# Altium PCB Copy of ANT-F-2.4G-FR4.PcbDoc (part 1 of 3)
Units mil, origin at the board's own origin, x right, y up, seen from the top; angles counter-clockwise.
Board outline 8878.9 x 2863.35 mil, 2 copper layers (Top Layer, Bottom Layer); 99 components, 48 nets, 825 pads, 1430 vias.
Unrouted connection lines stored in the file: 96.
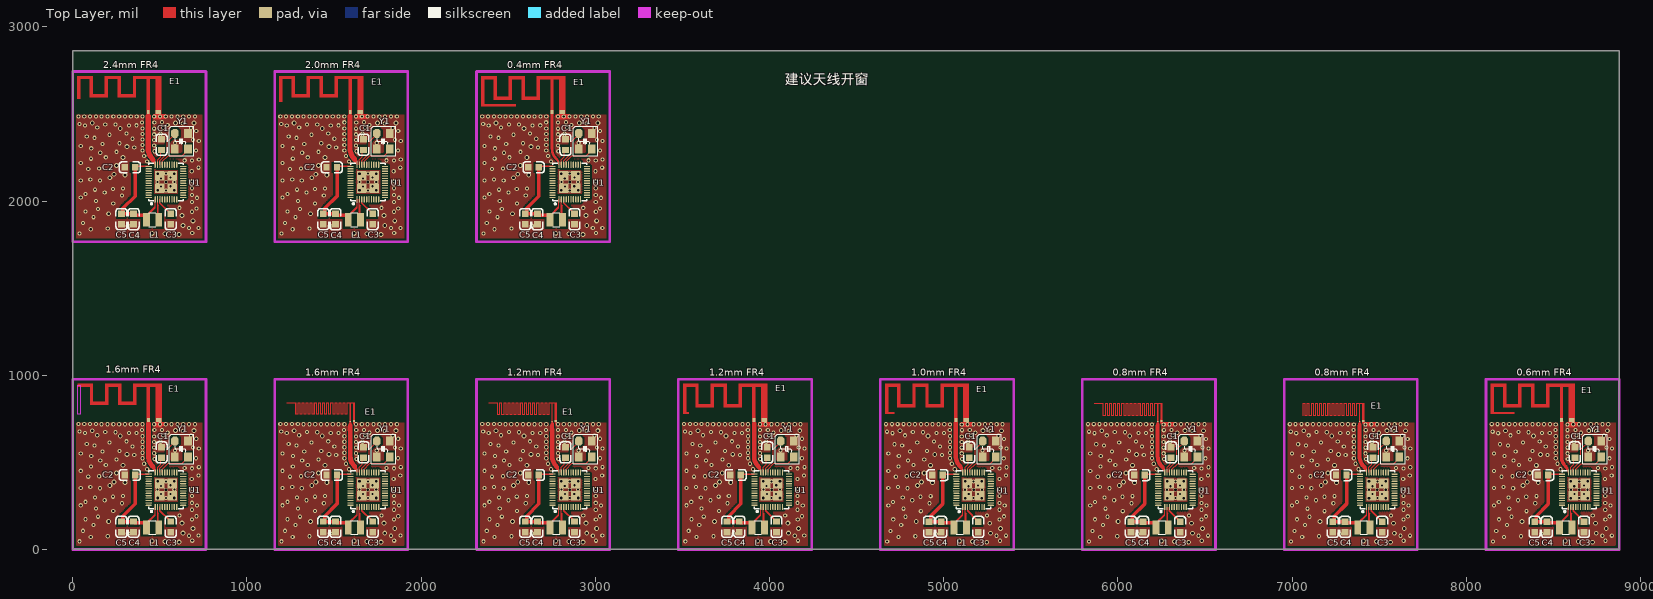
[diagram p0: Top Layer view]
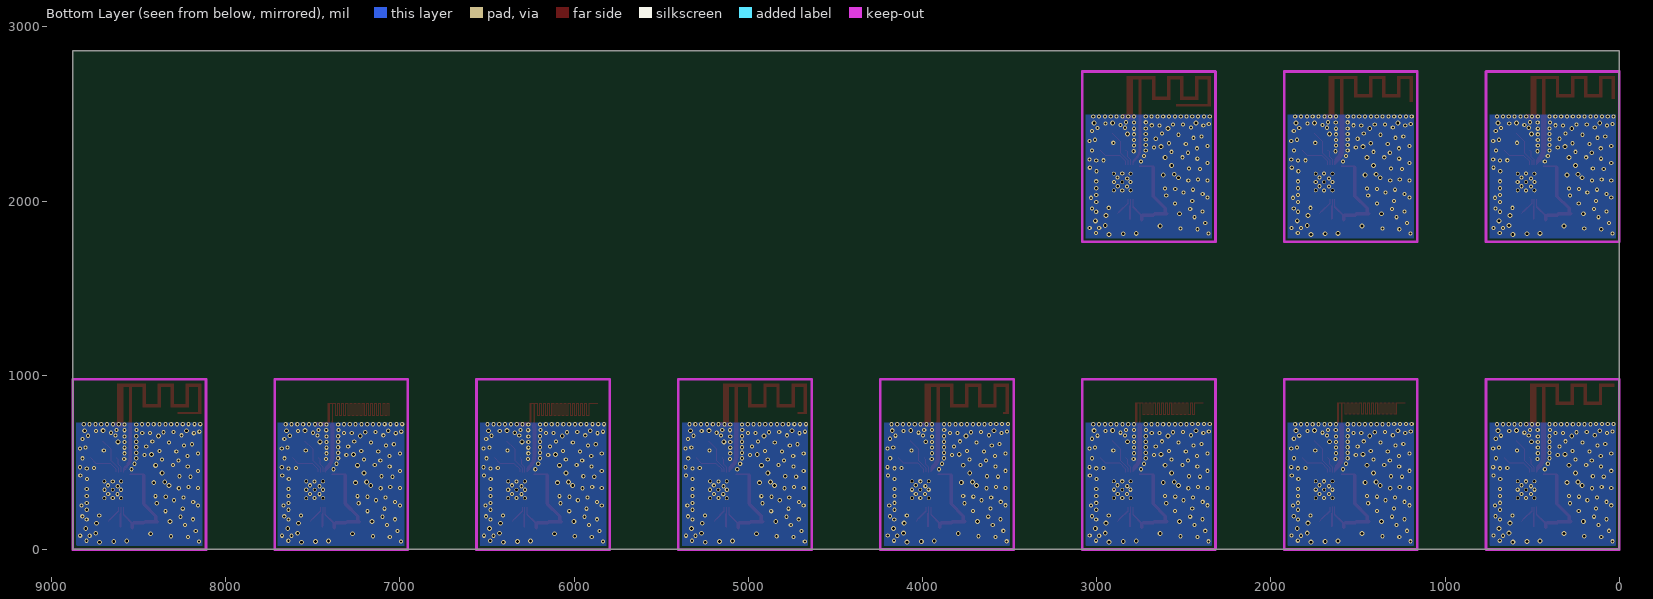
[diagram p1: Bottom Layer view, seen from below]

## Layer stack, top to bottom
Top Solder: solder mask 0.4, Solder Resist, Dk 3.5
Top Layer: signal copper 1.4
Dielectric 1: dielectric 12.6, FR-4, Dk 4.8
Bottom Layer: signal copper 1.4
Bottom Solder: solder mask 0.4, Solder Resist, Dk 3.5

## Board outline
0,0.33 0,2863.68 8878.9,2863.68 8878.9,0.33

## Design rules (kind name [scope] priority, off if disabled: settings)
AssemblyTestPointUsage [All] p0: scope1count=1 scope1_0_kind=Board scope1_0_value=Board scope2count=1 scope2_0_kind=Board scope2_0_value=Board commentlength=0
AssemblyTestpoint [All] p0: scope1count=1 scope1_0_kind=Board scope1_0_value=Board scope2count=1 scope2_0_kind=Board scope2_0_value=Board commentlength=0
Clearance Clearance_2 [All] p0: scope1count=1 scope1_0_kind=Net scope1_0_value=ANT scope2count=1 scope2_0_kind=Board scope2_0_value=Board commentlength=0 gap=6
Clearance [All] p0: scope1count=1 scope1_0_kind=Board scope1_0_value=Board scope2count=1 scope2_0_kind=Board scope2_0_value=Board commentlength=0 gap=6
Clearance Clearance_1 [All] p0 off: scope1count=1 scope1_0_kind=Board scope1_0_value=Board scope2count=1 scope2_0_kind=Board scope2_0_value=Board commentlength=48 gap=10 // Protel DXP Scope 1 Expression Was: InPolygon
Clearance Clearance_2 [InNet('ANT')] p1: gap=6 ignorepadtopadclearanceinfootprint=FALSE
Clearance Clearance_1 [InPolygon] p2: gap=10 ignorepadtopadclearanceinfootprint=FALSE
Clearance [All] p3: gap=6 ignorepadtopadclearanceinfootprint=FALSE except(8: Arc-Via Track-Via SMDPad-Via THPad-Via Via-Via Via-Fill Via-Poly Via-Region Via-Hole)
ComponentClearance [All] p0 off: scope1count=1 scope1_0_kind=Board scope1_0_value=Board scope2count=1 scope2_0_kind=Board scope2_0_value=Board commentlength=0 gap=10 collisioncheckmode=3
ComponentClearance [All] p1 off: gap=10 collisioncheckmode=3 verticalgap=10 showdistances=FALSE
DiffPairsRouting [All] p0: scope1count=1 scope1_0_kind=Board scope1_0_value=Board scope2count=1 scope2_0_kind=Board scope2_0_value=Board commentlength=0
DiffPairsRouting [All] p1: maxlimit=10 minlimit=7 mostfreqgap=8 toplayer_minwidth=6 toplayer_maxwidth=15 toplayer_prefwidth=8 bottomlayer_minwidth=6 bottomlayer_maxwidth=15 bottomlayer_prefwidth=8 maxuncoupledlength=500
FabricationTestPointUsage [All] p0: scope1count=1 scope1_0_kind=Board scope1_0_value=Board scope2count=1 scope2_0_kind=Board scope2_0_value=Board commentlength=0 valid=0 allowmultiple=FALSE
FabricationTestpoint [All] p0: scope1count=1 scope1_0_kind=Board scope1_0_value=Board scope2count=1 scope2_0_kind=Board scope2_0_value=Board commentlength=0 side=3 testpointundercomponent=TRUE minsize=40 maxsize=100 preferedsize=60 minholesize=0 maxholesize=40 preferedholesize=32 testpointgrid=1
FanoutControl Fanout_Default [All] p0: scope1count=1 scope1_0_kind=Board scope1_0_value=Board scope2count=1 scope2_0_kind=Board scope2_0_value=Board commentlength=30 // Fanout_Default (Default Rule)
FanoutControl Fanout_Small [All] p0 off: scope1count=1 scope1_0_kind=Board scope1_0_value=Board scope2count=1 scope2_0_kind=Board scope2_0_value=Board commentlength=84 // Protel DXP Scope 1 Expression Was: (CompPinCount < 5)   Fanout_Small (Default Rule)
FanoutControl Fanout_SOIC [All] p0 off: scope1count=1 scope1_0_kind=Board scope1_0_value=Board scope2count=1 scope2_0_kind=Board scope2_0_value=Board commentlength=71 // Protel DXP Scope 1 Expression Was: IsSOIC   Fanout_SOIC (Default Rule)
FanoutControl Fanout_LCC [All] p0 off: scope1count=1 scope1_0_kind=Board scope1_0_value=Board scope2count=1 scope2_0_kind=Board scope2_0_value=Board commentlength=69 // Protel DXP Scope 1 Expression Was: IsLCC   Fanout_LCC (Default Rule)
FanoutControl Fanout_BGA [All] p0 off: scope1count=1 scope1_0_kind=Board scope1_0_value=Board scope2count=1 scope2_0_kind=Board scope2_0_value=Board commentlength=69 // Protel DXP Scope 1 Expression Was: IsBGA   Fanout_BGA (Default Rule)
Height [All] p0: scope1count=1 scope1_0_kind=Board scope1_0_value=Board scope2count=1 scope2_0_kind=Board scope2_0_value=Board commentlength=0
HoleSize [All] p0: scope1count=1 scope1_0_kind=Board scope1_0_value=Board scope2count=1 scope2_0_kind=Board scope2_0_value=Board commentlength=0 absolutevalues=TRUE maxlimit=100 minlimit=1 maxpercent=80.000 minpercent=20.000
HoleToHoleClearance [All] p0: scope1count=1 scope1_0_kind=Board scope1_0_value=Board scope2count=1 scope2_0_kind=Board scope2_0_value=Board commentlength=0
LayerPairs [All] p0: scope1count=1 scope1_0_kind=Board scope1_0_value=Board scope2count=1 scope2_0_kind=Board scope2_0_value=Board commentlength=0 enforce=TRUE
MinimumSolderMaskSliver [All] p0 off: scope1count=1 scope1_0_kind=Board scope1_0_value=Board scope2count=1 scope2_0_kind=Board scope2_0_value=Board commentlength=0
MinimumSolderMaskSliver [All] p1 off: minsoldermaskwidth=10
NetAntennae [All] p0: scope1count=1 scope1_0_kind=Board scope1_0_value=Board scope2count=1 scope2_0_kind=Board scope2_0_value=Board commentlength=0
PasteMaskExpansion [All] p0: scope1count=1 scope1_0_kind=Board scope1_0_value=Board scope2count=1 scope2_0_kind=Board scope2_0_value=Board commentlength=0 expansion=0
PlaneClearance [All] p0: scope1count=1 scope1_0_kind=Board scope1_0_value=Board scope2count=1 scope2_0_kind=Board scope2_0_value=Board commentlength=0 clearance=20
PlaneConnect [All] p0: scope1count=1 scope1_0_kind=Board scope1_0_value=Board scope2count=1 scope2_0_kind=Board scope2_0_value=Board commentlength=0 planeconnectstyle=Relief reliefexpansion=20 reliefentries=4 reliefconductorwidth=10 reliefairgap=10
PolygonConnect [All] p0: scope1count=1 scope1_0_kind=Board scope1_0_value=Board scope2count=1 scope2_0_kind=Board scope2_0_value=Board commentlength=0 connectstyle=Direct reliefconductorwidth=20 reliefentries=4 polygonreliefangle="90 Angle"
PolygonConnect [All] p1: connectstyle=Direct reliefconductorwidth=20 reliefentries=4 polygonreliefangle="90 Angle" airgapwidth=10
RoutingCorners [All] p0: scope1count=1 scope1_0_kind=Board scope1_0_value=Board scope2count=1 scope2_0_kind=Board scope2_0_value=Board commentlength=0 cornerstyle=45-Degree minsetback=100 maxsetback=100
RoutingLayers [All] p0: scope1count=1 scope1_0_kind=Board scope1_0_value=Board scope2count=1 scope2_0_kind=Board scope2_0_value=Board commentlength=0 top layer=Automatic bottom layer=Automatic
RoutingPriority [All] p0: scope1count=1 scope1_0_kind=Board scope1_0_value=Board scope2count=1 scope2_0_kind=Board scope2_0_value=Board commentlength=0
RoutingTopology [All] p0: scope1count=1 scope1_0_kind=Board scope1_0_value=Board scope2count=1 scope2_0_kind=Board scope2_0_value=Board commentlength=0 topology=Shortest
RoutingVias [All] p0: scope1count=1 scope1_0_kind=Board scope1_0_value=Board scope2count=1 scope2_0_kind=Board scope2_0_value=Board commentlength=0 holewidth=16 width=28 viastyle="Through Hole" minholewidth=12 minwidth=24 maxholewidth=28 maxwidth=50
RoutingVias [All] p1: holewidth=16 width=28 viastyle="Through Hole" minholewidth=12 minwidth=24 maxholewidth=28 maxwidth=50
ShortCircuit [All] p0: scope1count=1 scope1_0_kind=Board scope1_0_value=Board scope2count=1 scope2_0_kind=Board scope2_0_value=Board commentlength=0 allowed=FALSE
SilkToBoardRegionClearance [All] p0: scope1count=1 scope1_0_kind=Board scope1_0_value=Board scope2count=1 scope2_0_kind=Board scope2_0_value=Board commentlength=0
SilkToSilkClearance [All] p0 off: scope1count=1 scope1_0_kind=Board scope1_0_value=Board scope2count=1 scope2_0_kind=Board scope2_0_value=Board commentlength=0
SilkToSilkClearance [All] p1 off: silktosilkclearance=10
SilkToSolderMaskClearance [All] p0 off: scope1count=1 scope1_0_kind=Board scope1_0_value=Board scope2count=1 scope2_0_kind=Board scope2_0_value=Board commentlength=44 // Protel DXP Scope 1 Expression Was: IsPad
SilkToSolderMaskClearance [IsPad] p1 off: minsilkscreentomaskgap=10 clearancetoexposedcopper=TRUE
SolderMaskExpansion [All] p0: scope1count=1 scope1_0_kind=Board scope1_0_value=Board scope2count=1 scope2_0_kind=Board scope2_0_value=Board commentlength=0 expansion=4
SolderMaskExpansion [All] p1: expansion=4 istentingtop=FALSE
UnRoutedNet [All] p0: scope1count=1 scope1_0_kind=Board scope1_0_value=Board scope2count=1 scope2_0_kind=Board scope2_0_value=Board commentlength=0
UnpouredPolygon [All] p0: scope1count=1 scope1_0_kind=Board scope1_0_value=Board scope2count=1 scope2_0_kind=Board scope2_0_value=Board commentlength=0
Width [All] p0: scope1count=1 scope1_0_kind=Board scope1_0_value=Board scope2count=1 scope2_0_kind=Board scope2_0_value=Board commentlength=0 maxlimit=100 minlimit=6 preferedwidth=10
Width [All] p1: maxlimit=100 minlimit=6 preferedwidth=10
25 further rules are at their usual default settings.

## Components (designator, comment, footprint, x,y, rotation, side; value= is the part's Value field where it differs from the comment)
C1 "2.2uF" 0603_C 2828.57,2293.72 r90 top
C1 "2.2uF" 0603_C 1669.49,2293.72 r90 top
C1 "2.2uF" 0603_C 510.42,2293.72 r90 top
C1 "2.2uF" 0603_C 8623.94,527.08 r90 top
C1 "2.2uF" 0603_C 7464.87,527.08 r90 top
C1 "2.2uF" 0603_C 6305.79,527.08 r90 top
C1 "2.2uF" 0603_C 5146.72,527.08 r90 top
C1 "2.2uF" 0603_C 3987.64,527.41 r90 top
C1 "2.2uF" 0603_C 2828.57,527.41 r90 top
C1 "2.2uF" 0603_C 1669.49,527.41 r90 top
C1 "2.2uF" 0603_C 510.42,527.41 r90 top
C2 "0.1uF" 0603_C 2676.6,2193.87 r180 top
C2 "0.1uF" 0603_C 1517.53,2193.87 r180 top
C2 "0.1uF" 0603_C 358.45,2193.87 r180 top
C2 "0.1uF" 0603_C 8471.98,427.24 r180 top
C2 "0.1uF" 0603_C 7312.9,427.24 r180 top
C2 "0.1uF" 0603_C 6153.83,427.24 r180 top
C2 "0.1uF" 0603_C 4994.75,427.24 r180 top
C2 "0.1uF" 0603_C 3835.68,427.57 r180 top
C2 "0.1uF" 0603_C 2676.6,427.57 r180 top
C2 "0.1uF" 0603_C 1517.53,427.57 r180 top
C2 "0.1uF" 0603_C 358.45,427.57 r180 top
C3 "2.2uF" 0603_C 2881,1866.22 r90 top
C3 "2.2uF" 0603_C 1721.92,1866.22 r90 top
C3 "2.2uF" 0603_C 562.85,1866.22 r90 top
C3 "2.2uF" 0603_C 8676.37,99.58 r90 top
C3 "2.2uF" 0603_C 7517.3,99.58 r90 top
C3 "2.2uF" 0603_C 6358.22,99.58 r90 top
C3 "2.2uF" 0603_C 5199.15,99.58 r90 top
C3 "2.2uF" 0603_C 4040.07,99.91 r90 top
C3 "2.2uF" 0603_C 2881,99.91 r90 top
C3 "2.2uF" 0603_C 1721.92,99.91 r90 top
C3 "2.2uF" 0603_C 562.85,99.91 r90 top
C4 "2.2uF" 0603_C 2667.8,1866.22 r90 top
C4 "2.2uF" 0603_C 1508.73,1866.22 r90 top
C4 "2.2uF" 0603_C 349.65,1866.22 r90 top
C4 "2.2uF" 0603_C 8463.18,99.58 r90 top
C4 "2.2uF" 0603_C 7304.1,99.58 r90 top
C4 "2.2uF" 0603_C 6145.03,99.58 r90 top
C4 "2.2uF" 0603_C 4985.95,99.58 r90 top
C4 "2.2uF" 0603_C 3826.88,99.91 r90 top
C4 "2.2uF" 0603_C 2667.8,99.91 r90 top
C4 "2.2uF" 0603_C 1508.73,99.91 r90 top
C4 "2.2uF" 0603_C 349.65,99.91 r90 top
C5 "2.2uF" 0603_C 2597.79,1866.22 r90 top
C5 "2.2uF" 0603_C 1438.72,1866.22 r90 top
C5 "2.2uF" 0603_C 279.64,1866.22 r90 top
C5 "2.2uF" 0603_C 8393.17,99.58 r90 top
C5 "2.2uF" 0603_C 7234.1,99.58 r90 top
C5 "2.2uF" 0603_C 6075.02,99.58 r90 top
C5 "2.2uF" 0603_C 4915.94,99.58 r90 top
C5 "2.2uF" 0603_C 3756.87,99.91 r90 top
C5 "2.2uF" 0603_C 2597.79,99.91 r90 top
C5 "2.2uF" 0603_C 1438.72,99.91 r90 top
C5 "2.2uF" 0603_C 279.64,99.91 r90 top
E1 "" ANT-F-3-2.4G-1.6mmFR4 1593.52,735.55 r180 top
E1 "" ANT-F-2-2.4G-1.2mmFR4 2752.45,735.55 r180 top
E1 "" ANT-F-2-2.4G-0.8mmFR4 7388.14,735.22 r180 top
E1 "" ANT-F-1-2.4G-2.4mmFR4 433.85,2510.87 r0 top
E1 "" ANT-F-1-2.4G-2.0mmFR4 1592.92,2510.87 r0 top
E1 "" ANT-F-1-2.4G-1.2mmFR4 3911.28,744.41 r0 top
E1 "" ANT-F-1-2.4G-1.0mmFR4 5070.36,744.08 r0 top
E1 "" ANT-F-1-2.4G-0.6mmFR4 8547.39,744.08 r0 top
E1 "" ANT-F-1-2.4G-0.4mmFR4 2752.01,2510.72 r0 top
E1 "ANTENNA" ANT-F-1-2.4G-1.6mmFR4 435.07,744.57 r0 top
L1 "22uH" SMD_2x2mm 2776.55,1892.87 r180 top
L1 "22uH" SMD_2x2mm 1617.47,1892.87 r180 top
L1 "22uH" SMD_2x2mm 458.4,1892.87 r180 top
L1 "22uH" SMD_2x2mm 8571.92,126.23 r180 top
L1 "22uH" SMD_2x2mm 7412.85,126.23 r180 top
L1 "22uH" SMD_2x2mm 6253.77,126.23 r180 top
L1 "22uH" SMD_2x2mm 5094.7,126.23 r180 top
L1 "22uH" SMD_2x2mm 3935.62,126.56 r180 top
L1 "22uH" SMD_2x2mm 2776.55,126.56 r180 top
L1 "22uH" SMD_2x2mm 1617.47,126.56 r180 top
L1 "22uH" SMD_2x2mm 458.4,126.56 r180 top
U1 "CH582M" QFN48_5X5 2853.61,2109.71 r0 top
U1 "CH582M" QFN48_5X5 1694.53,2109.71 r0 top
U1 "CH582M" QFN48_5X5 535.46,2109.71 r0 top
U1 "CH582M" QFN48_5X5 8648.98,343.08 r0 top
U1 "CH582M" QFN48_5X5 7489.91,343.08 r0 top
U1 "CH582M" QFN48_5X5 6330.83,343.08 r0 top
U1 "CH582M" QFN48_5X5 5171.76,343.08 r0 top
U1 "CH582M" QFN48_5X5 4012.68,343.41 r0 top
U1 "CH582M" QFN48_5X5 2853.61,343.41 r0 top
U1 "CH582M" QFN48_5X5 1694.53,343.41 r0 top
U1 "CH582M" QFN48_5X5 535.46,343.41 r0 top
Y1 "32M" XT3225 2905.26,2388.63 r270 top
Y1 "32M" XT3225 1746.18,2388.63 r270 top
Y1 "32M" XT3225 587.11,2388.63 r270 top
Y1 "32M" XT3225 8700.64,621.99 r270 top
Y1 "32M" XT3225 7541.56,621.99 r270 top
Y1 "32M" XT3225 6382.48,621.99 r270 top
Y1 "32M" XT3225 5223.41,621.99 r270 top
Y1 "32M" XT3225 4064.33,622.33 r270 top
Y1 "32M" XT3225 2905.26,622.33 r270 top
Y1 "32M" XT3225 1746.18,622.33 r270 top
Y1 "32M" XT3225 587.11,622.33 r270 top
? "" ANT-F-1-2.4G-0.8mmFR4 6229.07,735.22 r180 top

## Footprints (in the part's own frame and the unit in brackets; to place one, negate y for a bottom-side part, rotate by r counter-clockwise, add the part's x,y. Pads: shape width x height; smd on the part's side, far side on the other; paste and mask are expansions set on the pad)
0603_C [mm]
  rect 0.93x0.98 smd: 1(0,0) 2(1.54,0)
  silkscreen extent -0.76,-0.79 2.31,0.79
ANT-F-1-2.4G-0.4mmFR4 [mm]
  rect 0.8x0.6 smd mask+0: 0(1.483,0)
  rect 0.4x0.6 smd mask+0: 1(0,0)
  Top Layer region: -9.86,4.98 -10.36,4.98 -10.36,0.86 -9.86,0.86
  Top Layer region: -8.06,5.3 -10.36,5.3 -10.36,4.8 -8.06,4.8
  Top Layer region: -8.06,4.98 -8.56,4.98 -8.56,1.8 -8.06,1.8
  Top Layer region: -5.875,2.3 -8.364,2.3 -8.364,1.8 -5.875,1.8
  Top Layer region: -5.86,4.98 -6.36,4.98 -6.36,1.8 -5.86,1.8
  Top Layer region: -3.96,5.3 -6.36,5.3 -6.36,4.8 -3.96,4.8
  Top Layer region: -3.96,4.98 -4.46,4.98 -4.46,1.8 -3.96,1.8
  Top Layer region: -1.85,2.3 -4.39,2.3 -4.39,1.8 -1.85,1.8
  Top Layer region: -1.76,4.98 -2.26,4.98 -2.26,1.8 -1.76,1.8
  Top Layer region: 1.94,5.3 -2.26,5.3 -2.26,4.8 1.94,4.8
  Top Layer region: 1.94,5.005 1.04,5.005 1.04,-0.3 1.94,-0.3
  Top Layer region: 0.24,5.031 -0.26,5.031 -0.26,-0.3 0.24,-0.3
  Top Layer region: -5.26,1.16 -10.36,1.16 -10.36,0.86 -5.26,0.86
ANT-F-1-2.4G-0.6mmFR4 [mm]
  rect 0.8x0.6 smd mask+0: 0(1.483,0)
  rect 0.4x0.6 smd mask+0: 1(0,0)
  Top Layer region: -6.86,1.16 -10.36,1.16 -10.36,0.86 -6.86,0.86
  Top Layer region: 0.24,5.031 -0.26,5.031 -0.26,-0.3 0.24,-0.3
  Top Layer region: 1.94,5.005 1.04,5.005 1.04,-0.3 1.94,-0.3
  Top Layer region: 1.94,5.3 -2.26,5.3 -2.26,4.8 1.94,4.8
  Top Layer region: -1.76,4.98 -2.26,4.98 -2.26,1.8 -1.76,1.8
  Top Layer region: -1.85,2.3 -4.39,2.3 -4.39,1.8 -1.85,1.8
  Top Layer region: -3.96,4.98 -4.46,4.98 -4.46,1.8 -3.96,1.8
  Top Layer region: -3.96,5.3 -6.36,5.3 -6.36,4.8 -3.96,4.8
  Top Layer region: -5.86,4.98 -6.36,4.98 -6.36,1.8 -5.86,1.8
  Top Layer region: -5.875,2.3 -8.364,2.3 -8.364,1.8 -5.875,1.8
  Top Layer region: -8.06,4.98 -8.56,4.98 -8.56,1.8 -8.06,1.8
  Top Layer region: -8.06,5.3 -10.36,5.3 -10.36,4.8 -8.06,4.8
  Top Layer region: -9.86,4.98 -10.36,4.98 -10.36,0.86 -9.86,0.86
ANT-F-1-2.4G-0.8mmFR4 [mm]
  rect 0.3x0.3 smd mask+0: 0(-0.525,-0.075)
  rect 0.15x0.15 smd mask+0: 1(0,0)
  Top Layer region: 7.875,-2.725 8.025,-2.725 8.025,-0.825 7.875,-0.825
  Top Layer region: 7.875,-2.725 9.275,-2.725 9.275,-2.575 7.875,-2.575
  Top Layer region: 7.575,-0.975 8.025,-0.975 8.025,-0.825 7.575,-0.825
  Top Layer region: 6.675,-2.725 6.825,-2.725 6.825,-0.825 6.675,-0.825
  Top Layer region: 6.975,-2.725 7.125,-2.725 7.125,-0.825 6.975,-0.825
  Top Layer region: 7.275,-2.725 7.425,-2.725 7.425,-0.825 7.275,-0.825
  Top Layer region: 7.575,-2.725 7.725,-2.725 7.725,-0.825 7.575,-0.825
  Top Layer region: 6.675,-2.725 7.125,-2.725 7.125,-2.575 6.675,-2.575
  Top Layer region: 7.275,-2.725 7.725,-2.725 7.725,-2.575 7.275,-2.575
  Top Layer region: 6.375,-0.975 6.825,-0.975 6.825,-0.825 6.375,-0.825
  Top Layer region: 6.975,-0.975 7.425,-0.975 7.425,-0.825 6.975,-0.825
  Top Layer region: 5.475,-2.725 5.625,-2.725 5.625,-0.825 5.475,-0.825
  Top Layer region: 5.775,-2.725 5.925,-2.725 5.925,-0.825 5.775,-0.825
  Top Layer region: 6.075,-2.725 6.225,-2.725 6.225,-0.825 6.075,-0.825
  Top Layer region: 6.375,-2.725 6.525,-2.725 6.525,-0.825 6.375,-0.825
  Top Layer region: 5.475,-2.725 5.925,-2.725 5.925,-2.575 5.475,-2.575
  Top Layer region: 6.075,-2.725 6.525,-2.725 6.525,-2.575 6.075,-2.575
  Top Layer region: 5.175,-0.975 5.625,-0.975 5.625,-0.825 5.175,-0.825
  Top Layer region: 5.775,-0.975 6.225,-0.975 6.225,-0.825 5.775,-0.825
  Top Layer region: 4.275,-2.725 4.425,-2.725 4.425,-0.825 4.275,-0.825
  Top Layer region: 4.575,-2.725 4.725,-2.725 4.725,-0.825 4.575,-0.825
  Top Layer region: 4.875,-2.725 5.025,-2.725 5.025,-0.825 4.875,-0.825
  Top Layer region: 5.175,-2.725 5.325,-2.725 5.325,-0.825 5.175,-0.825
  Top Layer region: 4.275,-2.725 4.725,-2.725 4.725,-2.575 4.275,-2.575
  Top Layer region: 4.875,-2.725 5.325,-2.725 5.325,-2.575 4.875,-2.575
  Top Layer region: 3.975,-0.975 4.425,-0.975 4.425,-0.825 3.975,-0.825
  Top Layer region: 4.575,-0.975 5.025,-0.975 5.025,-0.825 4.575,-0.825
  Top Layer region: 3.075,-2.725 3.225,-2.725 3.225,-0.825 3.075,-0.825
  Top Layer region: 3.375,-2.725 3.525,-2.725 3.525,-0.825 3.375,-0.825
  Top Layer region: 3.675,-2.725 3.825,-2.725 3.825,-0.825 3.675,-0.825
  Top Layer region: 3.975,-2.725 4.125,-2.725 4.125,-0.825 3.975,-0.825
  Top Layer region: 3.075,-2.725 3.525,-2.725 3.525,-2.575 3.075,-2.575
  Top Layer region: 3.675,-2.725 4.125,-2.725 4.125,-2.575 3.675,-2.575
  Top Layer region: 2.775,-0.975 3.225,-0.975 3.225,-0.825 2.775,-0.825
  Top Layer region: 3.375,-0.975 3.825,-0.975 3.825,-0.825 3.375,-0.825
  Top Layer region: 1.875,-2.725 2.025,-2.725 2.025,-0.825 1.875,-0.825
  Top Layer region: 2.175,-2.725 2.325,-2.725 2.325,-0.825 2.175,-0.825
  Top Layer region: 2.475,-2.725 2.625,-2.725 2.625,-0.825 2.475,-0.825
  Top Layer region: 2.775,-2.725 2.925,-2.725 2.925,-0.825 2.775,-0.825
  Top Layer region: 1.875,-2.725 2.325,-2.725 2.325,-2.575 1.875,-2.575
  Top Layer region: 2.475,-2.725 2.925,-2.725 2.925,-2.575 2.475,-2.575
  Top Layer region: 1.575,-0.975 2.025,-0.975 2.025,-0.825 1.575,-0.825
  Top Layer region: 2.175,-0.975 2.625,-0.975 2.625,-0.825 2.175,-0.825
  Top Layer region: 0.975,-0.975 1.425,-0.975 1.425,-0.825 0.975,-0.825
  Top Layer region: 0.375,-0.975 0.825,-0.975 0.825,-0.825 0.375,-0.825
  Top Layer region: 1.275,-2.725 1.725,-2.725 1.725,-2.575 1.275,-2.575
  Top Layer region: 0.675,-2.725 1.125,-2.725 1.125,-2.575 0.675,-2.575
  Top Layer region: 0.075,-2.725 0.525,-2.725 0.525,-2.575 0.075,-2.575
  Top Layer region: 1.575,-2.725 1.725,-2.725 1.725,-0.825 1.575,-0.825
  Top Layer region: 1.275,-2.725 1.425,-2.725 1.425,-0.825 1.275,-0.825
  Top Layer region: 0.975,-2.725 1.125,-2.725 1.125,-0.825 0.975,-0.825
  Top Layer region: 0.675,-2.725 0.825,-2.725 0.825,-0.825 0.675,-0.825
  Top Layer region: 0.375,-2.725 0.525,-2.725 0.525,-0.825 0.375,-0.825
  Top Layer region: -0.675,-2.575 -0.675,-2.725 0.075,-2.725 0.075,-2.575
  Top Layer region: -0.075,-2.725 0.075,-2.725 0.075,0.075 -0.075,0.075
  Top Layer region: -0.675,-2.725 -0.375,-2.725 -0.375,0.075 -0.675,0.075
ANT-F-1-2.4G-1.0mmFR4 [mm]
  rect 0.8x0.6 smd mask+0: 0(1.483,0)
  rect 0.4x0.6 smd mask+0: 1(0,0)
  Top Layer region: -9.86,4.98 -10.36,4.98 -10.36,0.86 -9.86,0.86
  Top Layer region: -8.06,5.3 -10.36,5.3 -10.36,4.8 -8.06,4.8
  Top Layer region: -8.06,4.98 -8.56,4.98 -8.56,1.8 -8.06,1.8
  Top Layer region: -5.875,2.3 -8.364,2.3 -8.364,1.8 -5.875,1.8
  Top Layer region: -5.86,4.98 -6.36,4.98 -6.36,1.8 -5.86,1.8
  Top Layer region: -3.96,5.3 -6.36,5.3 -6.36,4.8 -3.96,4.8
  Top Layer region: -3.96,4.98 -4.46,4.98 -4.46,1.8 -3.96,1.8
  Top Layer region: -1.85,2.3 -4.39,2.3 -4.39,1.8 -1.85,1.8
  Top Layer region: -1.76,4.98 -2.26,4.98 -2.26,1.8 -1.76,1.8
  Top Layer region: 1.94,5.3 -2.26,5.3 -2.26,4.8 1.94,4.8
  Top Layer region: 1.94,5.005 1.04,5.005 1.04,-0.3 1.94,-0.3
  Top Layer region: 0.24,5.031 -0.26,5.031 -0.26,-0.3 0.24,-0.3
  Top Layer region: -8.96,1.16 -10.36,1.16 -10.36,0.86 -8.96,0.86
ANT-F-1-2.4G-1.2mmFR4 [mm]
  rect 0.8x0.6 smd mask+0: 0(1.483,0)
  rect 0.4x0.6 smd mask+0: 1(0,0)
  Top Layer region: -9.46,1.16 -10.36,1.16 -10.36,0.86 -9.46,0.86
  Top Layer region: 0.24,5.031 -0.26,5.031 -0.26,-0.3 0.24,-0.3
  Top Layer region: 1.94,5.005 1.04,5.005 1.04,-0.3 1.94,-0.3
  Top Layer region: 1.94,5.3 -2.26,5.3 -2.26,4.8 1.94,4.8
  Top Layer region: -1.76,4.98 -2.26,4.98 -2.26,1.8 -1.76,1.8
  Top Layer region: -1.85,2.3 -4.39,2.3 -4.39,1.8 -1.85,1.8
  Top Layer region: -3.96,4.98 -4.46,4.98 -4.46,1.8 -3.96,1.8
  Top Layer region: -3.96,5.3 -6.36,5.3 -6.36,4.8 -3.96,4.8
  Top Layer region: -5.86,4.98 -6.36,4.98 -6.36,1.8 -5.86,1.8
  Top Layer region: -5.875,2.3 -8.364,2.3 -8.364,1.8 -5.875,1.8
  Top Layer region: -8.06,4.98 -8.56,4.98 -8.56,1.8 -8.06,1.8
  Top Layer region: -8.06,5.3 -10.36,5.3 -10.36,4.8 -8.06,4.8
  Top Layer region: -9.86,4.98 -10.36,4.98 -10.36,0.86 -9.86,0.86
ANT-F-1-2.4G-1.6mmFR4 [mm]
  rect 0.8x0.6 smd mask+0: 0(1.483,0)
  rect 0.4x0.6 smd mask+0: 1(0,0)
  Top Layer region: 0.24,5.027 -0.26,5.027 -0.26,-0.304 0.24,-0.304
  Top Layer region: 1.94,5.002 1.04,5.002 1.04,-0.304 1.94,-0.304
  Top Layer region: 1.94,5.296 -2.26,5.296 -2.26,4.796 1.94,4.796
  Top Layer region: -1.76,4.977 -2.26,4.977 -2.26,2.157 -1.76,2.157
  Top Layer region: -1.85,2.651 -4.39,2.651 -4.39,2.156 -1.85,2.156
  Top Layer region: -3.96,4.976 -4.46,4.976 -4.46,2.156 -3.96,2.156
  Top Layer region: -3.96,5.296 -6.36,5.296 -6.36,4.796 -3.96,4.796
  Top Layer region: -5.86,4.977 -6.36,4.977 -6.36,2.157 -5.86,2.157
  Top Layer region: -5.875,2.657 -8.364,2.657 -8.364,2.157 -5.875,2.157
  Top Layer region: -8.06,4.977 -8.56,4.977 -8.56,2.157 -8.06,2.157
  Top Layer region: -8.06,5.296 -10.36,5.296 -10.36,4.796 -8.06,4.796
  Top Layer keep-out region: -10.36,0.856 -9.86,0.856 -9.86,4.976 -10.36,4.976
ANT-F-1-2.4G-2.0mmFR4 [mm]
  rect 0.8x0.6 smd mask+0: 0(1.483,0)
  rect 0.4x0.6 smd mask+0: 1(0,0)
  Top Layer region: 0.24,5.027 -0.26,5.027 -0.26,-0.304 0.24,-0.304
  Top Layer region: 1.94,5.002 1.04,5.002 1.04,-0.304 1.94,-0.304
  Top Layer region: 1.94,5.296 -2.26,5.296 -2.26,4.796 1.94,4.796
  Top Layer region: -1.76,4.977 -2.26,4.977 -2.26,2.157 -1.76,2.157
  Top Layer region: -1.85,2.651 -4.39,2.651 -4.39,2.156 -1.85,2.156
  Top Layer region: -3.96,4.976 -4.46,4.976 -4.46,2.156 -3.96,2.156
  Top Layer region: -3.96,5.296 -6.36,5.296 -6.36,4.796 -3.96,4.796
  Top Layer region: -5.86,4.977 -6.36,4.977 -6.36,2.157 -5.86,2.157
  Top Layer region: -5.875,2.657 -8.364,2.657 -8.364,2.157 -5.875,2.157
  Top Layer region: -8.06,4.977 -8.56,4.977 -8.56,2.157 -8.06,2.157
  Top Layer region: -8.06,5.296 -10.36,5.296 -10.36,4.796 -8.06,4.796
  Top Layer region: -9.86,4.976 -10.36,4.976 -10.36,1.496 -9.86,1.496
ANT-F-1-2.4G-2.4mmFR4 [mm]
  rect 0.8x0.6 smd mask+0: 0(1.483,0)
  rect 0.4x0.6 smd mask+0: 1(0,0)
  Top Layer region: 0.24,5.027 -0.26,5.027 -0.26,-0.304 0.24,-0.304
  Top Layer region: 1.94,5.002 1.04,5.002 1.04,-0.304 1.94,-0.304
  Top Layer region: 1.94,5.296 -2.26,5.296 -2.26,4.796 1.94,4.796
  Top Layer region: -1.76,4.977 -2.26,4.977 -2.26,2.157 -1.76,2.157
  Top Layer region: -1.85,2.651 -4.39,2.651 -4.39,2.156 -1.85,2.156
  Top Layer region: -3.96,4.976 -4.46,4.976 -4.46,2.156 -3.96,2.156
  Top Layer region: -3.96,5.296 -6.36,5.296 -6.36,4.796 -3.96,4.796
  Top Layer region: -5.86,4.977 -6.36,4.977 -6.36,2.157 -5.86,2.157
  Top Layer region: -5.875,2.657 -8.364,2.657 -8.364,2.157 -5.875,2.157
  Top Layer region: -8.06,4.977 -8.56,4.977 -8.56,2.157 -8.06,2.157
  Top Layer region: -8.06,5.296 -10.36,5.296 -10.36,4.796 -8.06,4.796
  Top Layer region: -9.86,4.976 -10.36,4.976 -10.36,1.896 -9.86,1.896
ANT-F-2-2.4G-0.8mmFR4 [mm]
  rect 0.3x0.3 smd mask+0: 0(-0.525,-0.075)
  rect 0.15x0.15 smd mask+0: 1(0,0)
  Top Layer region: 7.875,-2.725 8.325,-2.725 8.325,-2.575 7.875,-2.575
  Top Layer region: 8.175,-2.725 8.325,-2.725 8.325,-0.825 8.175,-0.825
  Top Layer region: -0.675,-2.725 -0.375,-2.725 -0.375,0.075 -0.675,0.075
  Top Layer region: -0.075,-2.725 0.075,-2.725 0.075,0.075 -0.075,0.075
  Top Layer region: -0.675,-2.575 -0.675,-2.725 0.075,-2.725 0.075,-2.575
  Top Layer region: 0.375,-2.725 0.525,-2.725 0.525,-0.825 0.375,-0.825
  Top Layer region: 0.675,-2.725 0.825,-2.725 0.825,-0.825 0.675,-0.825
  Top Layer region: 0.975,-2.725 1.125,-2.725 1.125,-0.825 0.975,-0.825
  Top Layer region: 1.275,-2.725 1.425,-2.725 1.425,-0.825 1.275,-0.825
  Top Layer region: 1.575,-2.725 1.725,-2.725 1.725,-0.825 1.575,-0.825
  Top Layer region: -0.075,-2.725 0.525,-2.725 0.525,-2.575 -0.075,-2.575
  Top Layer region: 0.675,-2.725 1.125,-2.725 1.125,-2.575 0.675,-2.575
  Top Layer region: 1.275,-2.725 1.725,-2.725 1.725,-2.575 1.275,-2.575
  Top Layer region: 0.375,-0.975 0.825,-0.975 0.825,-0.825 0.375,-0.825
  Top Layer region: 0.975,-0.975 1.425,-0.975 1.425,-0.825 0.975,-0.825
  Top Layer region: 2.175,-0.975 2.625,-0.975 2.625,-0.825 2.175,-0.825
  Top Layer region: 1.575,-0.975 2.025,-0.975 2.025,-0.825 1.575,-0.825
  Top Layer region: 2.475,-2.725 2.925,-2.725 2.925,-2.575 2.475,-2.575
  Top Layer region: 1.875,-2.725 2.325,-2.725 2.325,-2.575 1.875,-2.575
  Top Layer region: 2.775,-2.725 2.925,-2.725 2.925,-0.825 2.775,-0.825
  Top Layer region: 2.475,-2.725 2.625,-2.725 2.625,-0.825 2.475,-0.825
  Top Layer region: 2.175,-2.725 2.325,-2.725 2.325,-0.825 2.175,-0.825
  Top Layer region: 1.875,-2.725 2.025,-2.725 2.025,-0.825 1.875,-0.825
  Top Layer region: 3.375,-0.975 3.825,-0.975 3.825,-0.825 3.375,-0.825
  Top Layer region: 2.775,-0.975 3.225,-0.975 3.225,-0.825 2.775,-0.825
  Top Layer region: 3.675,-2.725 4.125,-2.725 4.125,-2.575 3.675,-2.575
  Top Layer region: 3.075,-2.725 3.525,-2.725 3.525,-2.575 3.075,-2.575
  Top Layer region: 3.975,-2.725 4.125,-2.725 4.125,-0.825 3.975,-0.825
  Top Layer region: 3.675,-2.725 3.825,-2.725 3.825,-0.825 3.675,-0.825
  Top Layer region: 3.375,-2.725 3.525,-2.725 3.525,-0.825 3.375,-0.825
  Top Layer region: 3.075,-2.725 3.225,-2.725 3.225,-0.825 3.075,-0.825
  Top Layer region: 4.575,-0.975 5.025,-0.975 5.025,-0.825 4.575,-0.825
  Top Layer region: 3.975,-0.975 4.425,-0.975 4.425,-0.825 3.975,-0.825
  Top Layer region: 4.875,-2.725 5.325,-2.725 5.325,-2.575 4.875,-2.575
  Top Layer region: 4.275,-2.725 4.725,-2.725 4.725,-2.575 4.275,-2.575
  Top Layer region: 5.175,-2.725 5.325,-2.725 5.325,-0.825 5.175,-0.825
  Top Layer region: 4.875,-2.725 5.025,-2.725 5.025,-0.825 4.875,-0.825
  Top Layer region: 4.575,-2.725 4.725,-2.725 4.725,-0.825 4.575,-0.825
  Top Layer region: 4.275,-2.725 4.425,-2.725 4.425,-0.825 4.275,-0.825
  Top Layer region: 5.775,-0.975 6.225,-0.975 6.225,-0.825 5.775,-0.825
  Top Layer region: 5.175,-0.975 5.625,-0.975 5.625,-0.825 5.175,-0.825
  Top Layer region: 6.075,-2.725 6.525,-2.725 6.525,-2.575 6.075,-2.575
  Top Layer region: 5.475,-2.725 5.925,-2.725 5.925,-2.575 5.475,-2.575
  Top Layer region: 6.375,-2.725 6.525,-2.725 6.525,-0.825 6.375,-0.825
  Top Layer region: 6.075,-2.725 6.225,-2.725 6.225,-0.825 6.075,-0.825
  Top Layer region: 5.775,-2.725 5.925,-2.725 5.925,-0.825 5.775,-0.825
  Top Layer region: 5.475,-2.725 5.625,-2.725 5.625,-0.825 5.475,-0.825
  Top Layer region: 6.975,-0.975 7.425,-0.975 7.425,-0.825 6.975,-0.825
  Top Layer region: 6.375,-0.975 6.825,-0.975 6.825,-0.825 6.375,-0.825
  Top Layer region: 7.275,-2.725 7.725,-2.725 7.725,-2.575 7.275,-2.575
  Top Layer region: 6.675,-2.725 7.125,-2.725 7.125,-2.575 6.675,-2.575
  Top Layer region: 7.575,-2.725 7.725,-2.725 7.725,-0.825 7.575,-0.825
  Top Layer region: 7.275,-2.725 7.425,-2.725 7.425,-0.825 7.275,-0.825
  Top Layer region: 6.975,-2.725 7.125,-2.725 7.125,-0.825 6.975,-0.825
  Top Layer region: 6.675,-2.725 6.825,-2.725 6.825,-0.825 6.675,-0.825
  Top Layer region: 7.575,-0.975 8.025,-0.975 8.025,-0.825 7.575,-0.825
  Top Layer region: 7.875,-2.725 8.025,-2.725 8.025,-0.825 7.875,-0.825
ANT-F-2-2.4G-1.2mmFR4 [mm]
  rect 0.3x0.3 smd mask+0: 0(-0.525,-0.075)
  rect 0.15x0.15 smd mask+0: 1(0,0)
  Top Layer region: 7.875,-2.725 8.025,-2.725 8.025,-0.925 7.875,-0.925
  Top Layer region: 7.875,-2.725 9.275,-2.725 9.275,-2.575 7.875,-2.575
  Top Layer region: 7.575,-1.075 8.025,-1.075 8.025,-0.925 7.575,-0.925
  Top Layer region: 6.675,-2.725 6.825,-2.725 6.825,-0.925 6.675,-0.925
  Top Layer region: 6.975,-2.725 7.125,-2.725 7.125,-0.925 6.975,-0.925
  Top Layer region: 7.275,-2.725 7.425,-2.725 7.425,-0.925 7.275,-0.925
  Top Layer region: 7.575,-2.725 7.725,-2.725 7.725,-0.925 7.575,-0.925
  Top Layer region: 6.675,-2.725 7.125,-2.725 7.125,-2.575 6.675,-2.575
  Top Layer region: 7.275,-2.725 7.725,-2.725 7.725,-2.575 7.275,-2.575
  Top Layer region: 6.375,-1.075 6.825,-1.075 6.825,-0.925 6.375,-0.925
  Top Layer region: 6.975,-1.075 7.425,-1.075 7.425,-0.925 6.975,-0.925
  Top Layer region: 5.475,-2.725 5.625,-2.725 5.625,-0.925 5.475,-0.925
  Top Layer region: 5.775,-2.725 5.925,-2.725 5.925,-0.925 5.775,-0.925
  Top Layer region: 6.075,-2.725 6.225,-2.725 6.225,-0.925 6.075,-0.925
  Top Layer region: 6.375,-2.725 6.525,-2.725 6.525,-0.925 6.375,-0.925
  Top Layer region: 5.475,-2.725 5.925,-2.725 5.925,-2.575 5.475,-2.575
  Top Layer region: 6.075,-2.725 6.525,-2.725 6.525,-2.575 6.075,-2.575
  Top Layer region: 5.175,-1.075 5.625,-1.075 5.625,-0.925 5.175,-0.925
  Top Layer region: 5.775,-1.075 6.225,-1.075 6.225,-0.925 5.775,-0.925
  Top Layer region: 4.275,-2.725 4.425,-2.725 4.425,-0.925 4.275,-0.925
  Top Layer region: 4.575,-2.725 4.725,-2.725 4.725,-0.925 4.575,-0.925
  Top Layer region: 4.875,-2.725 5.025,-2.725 5.025,-0.925 4.875,-0.925
  Top Layer region: 5.175,-2.725 5.325,-2.725 5.325,-0.925 5.175,-0.925
  Top Layer region: 4.275,-2.725 4.725,-2.725 4.725,-2.575 4.275,-2.575
  Top Layer region: 4.875,-2.725 5.325,-2.725 5.325,-2.575 4.875,-2.575
  Top Layer region: 3.975,-1.075 4.425,-1.075 4.425,-0.925 3.975,-0.925
  Top Layer region: 4.575,-1.075 5.025,-1.075 5.025,-0.925 4.575,-0.925
  Top Layer region: 3.075,-2.725 3.225,-2.725 3.225,-0.925 3.075,-0.925
  Top Layer region: 3.375,-2.725 3.525,-2.725 3.525,-0.925 3.375,-0.925
  Top Layer region: 3.675,-2.725 3.825,-2.725 3.825,-0.925 3.675,-0.925
  Top Layer region: 3.975,-2.725 4.125,-2.725 4.125,-0.925 3.975,-0.925
  Top Layer region: 3.075,-2.725 3.525,-2.725 3.525,-2.575 3.075,-2.575
  Top Layer region: 3.675,-2.725 4.125,-2.725 4.125,-2.575 3.675,-2.575
  Top Layer region: 2.775,-1.075 3.225,-1.075 3.225,-0.925 2.775,-0.925
  Top Layer region: 3.375,-1.075 3.825,-1.075 3.825,-0.925 3.375,-0.925
  Top Layer region: 1.875,-2.725 2.025,-2.725 2.025,-0.925 1.875,-0.925
  Top Layer region: 2.175,-2.725 2.325,-2.725 2.325,-0.925 2.175,-0.925
  Top Layer region: 2.475,-2.725 2.625,-2.725 2.625,-0.925 2.475,-0.925
  Top Layer region: 2.775,-2.725 2.925,-2.725 2.925,-0.925 2.775,-0.925
  Top Layer region: 1.875,-2.725 2.325,-2.725 2.325,-2.575 1.875,-2.575
  Top Layer region: 2.475,-2.725 2.925,-2.725 2.925,-2.575 2.475,-2.575
  Top Layer region: 1.575,-1.075 2.025,-1.075 2.025,-0.925 1.575,-0.925
  Top Layer region: 2.175,-1.075 2.625,-1.075 2.625,-0.925 2.175,-0.925
  Top Layer region: 0.975,-1.075 1.425,-1.075 1.425,-0.925 0.975,-0.925
  Top Layer region: 0.375,-1.075 0.825,-1.075 0.825,-0.925 0.375,-0.925
  Top Layer region: 1.275,-2.725 1.725,-2.725 1.725,-2.575 1.275,-2.575
  Top Layer region: 0.675,-2.725 1.125,-2.725 1.125,-2.575 0.675,-2.575
  Top Layer region: 0.075,-2.725 0.525,-2.725 0.525,-2.575 0.075,-2.575
  Top Layer region: 1.575,-2.725 1.725,-2.725 1.725,-0.925 1.575,-0.925
  Top Layer region: 1.275,-2.725 1.425,-2.725 1.425,-0.925 1.275,-0.925
  Top Layer region: 0.975,-2.725 1.125,-2.725 1.125,-0.925 0.975,-0.925
  Top Layer region: 0.675,-2.725 0.825,-2.725 0.825,-0.925 0.675,-0.925
  Top Layer region: 0.375,-2.725 0.525,-2.725 0.525,-0.925 0.375,-0.925
  Top Layer region: -0.675,-2.575 -0.675,-2.725 0.075,-2.725 0.075,-2.575
  Top Layer region: -0.075,-2.725 0.075,-2.725 0.075,0.075 -0.075,0.075
  Top Layer region: -0.675,-2.725 -0.375,-2.725 -0.375,0.075 -0.675,0.075
ANT-F-3-2.4G-1.6mmFR4 [mm]
  rect 0.3x0.3 smd mask+0: 0(-0.525,-0.075)
  rect 0.15x0.15 smd mask+0: 1(0,0)
  Top Layer region: -0.675,-2.725 -0.375,-2.725 -0.375,0.075 -0.675,0.075
  Top Layer region: -0.075,-2.725 0.075,-2.725 0.075,0.075 -0.075,0.075
  Top Layer region: -0.675,-2.575 -0.675,-2.725 0.075,-2.725 0.075,-2.575
  Top Layer region: 0.375,-2.725 0.525,-2.725 0.525,-1.025 0.375,-1.025
  Top Layer region: 0.675,-2.725 0.825,-2.725 0.825,-1.025 0.675,-1.025
  Top Layer region: 0.975,-2.725 1.125,-2.725 1.125,-1.025 0.975,-1.025
  Top Layer region: 1.275,-2.725 1.425,-2.725 1.425,-1.025 1.275,-1.025
  Top Layer region: 1.575,-2.725 1.725,-2.725 1.725,-1.025 1.575,-1.025
  Top Layer region: 0.075,-2.725 0.525,-2.725 0.525,-2.575 0.075,-2.575
  Top Layer region: 0.675,-2.725 1.125,-2.725 1.125,-2.575 0.675,-2.575
  Top Layer region: 1.275,-2.725 1.725,-2.725 1.725,-2.575 1.275,-2.575
  Top Layer region: 0.375,-1.175 0.825,-1.175 0.825,-1.025 0.375,-1.025
  Top Layer region: 0.975,-1.175 1.425,-1.175 1.425,-1.025 0.975,-1.025
  Top Layer region: 2.175,-1.175 2.625,-1.175 2.625,-1.025 2.175,-1.025
  Top Layer region: 1.575,-1.175 2.025,-1.175 2.025,-1.025 1.575,-1.025
  Top Layer region: 2.475,-2.725 2.925,-2.725 2.925,-2.575 2.475,-2.575
  Top Layer region: 1.875,-2.725 2.325,-2.725 2.325,-2.575 1.875,-2.575
  Top Layer region: 2.775,-2.725 2.925,-2.725 2.925,-1.025 2.775,-1.025
  Top Layer region: 2.475,-2.725 2.625,-2.725 2.625,-1.025 2.475,-1.025
  Top Layer region: 2.175,-2.725 2.325,-2.725 2.325,-1.025 2.175,-1.025
  Top Layer region: 1.875,-2.725 2.025,-2.725 2.025,-1.025 1.875,-1.025
  Top Layer region: 3.375,-1.175 3.825,-1.175 3.825,-1.025 3.375,-1.025
  Top Layer region: 2.775,-1.175 3.225,-1.175 3.225,-1.025 2.775,-1.025
  Top Layer region: 3.675,-2.725 4.125,-2.725 4.125,-2.575 3.675,-2.575
  Top Layer region: 3.075,-2.725 3.525,-2.725 3.525,-2.575 3.075,-2.575
  Top Layer region: 3.975,-2.725 4.125,-2.725 4.125,-1.025 3.975,-1.025
  Top Layer region: 3.675,-2.725 3.825,-2.725 3.825,-1.025 3.675,-1.025
  Top Layer region: 3.375,-2.725 3.525,-2.725 3.525,-1.025 3.375,-1.025
  Top Layer region: 3.075,-2.725 3.225,-2.725 3.225,-1.025 3.075,-1.025
  Top Layer region: 4.575,-1.175 5.025,-1.175 5.025,-1.025 4.575,-1.025
  Top Layer region: 3.975,-1.175 4.425,-1.175 4.425,-1.025 3.975,-1.025
  Top Layer region: 4.875,-2.725 5.325,-2.725 5.325,-2.575 4.875,-2.575
  Top Layer region: 4.275,-2.725 4.725,-2.725 4.725,-2.575 4.275,-2.575
  Top Layer region: 5.175,-2.725 5.325,-2.725 5.325,-1.025 5.175,-1.025
  Top Layer region: 4.875,-2.725 5.025,-2.725 5.025,-1.025 4.875,-1.025
  Top Layer region: 4.575,-2.725 4.725,-2.725 4.725,-1.025 4.575,-1.025
  Top Layer region: 4.275,-2.725 4.425,-2.725 4.425,-1.025 4.275,-1.025
  Top Layer region: 5.775,-1.175 6.225,-1.175 6.225,-1.025 5.775,-1.025
  Top Layer region: 5.175,-1.175 5.625,-1.175 5.625,-1.025 5.175,-1.025
  Top Layer region: 6.075,-2.725 6.525,-2.725 6.525,-2.575 6.075,-2.575
  Top Layer region: 5.475,-2.725 5.925,-2.725 5.925,-2.575 5.475,-2.575
  Top Layer region: 6.375,-2.725 6.525,-2.725 6.525,-1.025 6.375,-1.025
  Top Layer region: 6.075,-2.725 6.225,-2.725 6.225,-1.025 6.075,-1.025
  Top Layer region: 5.775,-2.725 5.925,-2.725 5.925,-1.025 5.775,-1.025
  Top Layer region: 5.475,-2.725 5.625,-2.725 5.625,-1.025 5.475,-1.025
  Top Layer region: 6.975,-1.175 7.425,-1.175 7.425,-1.025 6.975,-1.025
  Top Layer region: 6.375,-1.175 6.825,-1.175 6.825,-1.025 6.375,-1.025
  Top Layer region: 7.275,-2.725 7.725,-2.725 7.725,-2.575 7.275,-2.575
  Top Layer region: 6.675,-2.725 7.125,-2.725 7.125,-2.575 6.675,-2.575
  Top Layer region: 7.575,-2.725 7.725,-2.725 7.725,-1.025 7.575,-1.025
  Top Layer region: 7.275,-2.725 7.425,-2.725 7.425,-1.025 7.275,-1.025
  Top Layer region: 6.975,-2.725 7.125,-2.725 7.125,-1.025 6.975,-1.025
  Top Layer region: 6.675,-2.725 6.825,-2.725 6.825,-1.025 6.675,-1.025
  Top Layer region: 7.575,-1.175 8.025,-1.175 8.025,-1.025 7.575,-1.025
  Top Layer region: 7.875,-2.725 9.275,-2.725 9.275,-2.575 7.875,-2.575
  Top Layer region: 7.875,-2.725 8.025,-2.725 8.025,-1.025 7.875,-1.025
QFN48_5X5 [mm]
  round 0.559 hole 0.381 mask+0: 0(-1.219,-1.219) 0(-1.219,1.219) 0(0,0) 0(1.219,-1.219) 0(1.219,1.219)
  rect 1.397x1.397 smd mask+0: 0(-0.901,-0.895) 0(-0.901,0.908) 0(0.902,-0.895) 0(0.902,0.908)
  oval 0.18x0.9 smd mask+0: 1(-1.575,-2.519) 2(-1.225,-2.519) 3(-0.875,-2.519) 4(-0.525,-2.519) 5(-0.175,-2.519) 6(0.175,-2.519) 7(0.525,-2.519) 8(0.875,-2.519) 9(1.225,-2.519) 10(1.575,-2.519) 25(1.575,2.519) 26(1.225,2.519) 27(0.875,2.519) 28(0.525,2.519) 29(0.175,2.519) 30(-0.175,2.519) 31(-0.525,2.519) 32(-0.875,2.519) 33(-1.225,2.519) 34(-1.575,2.519)
  oval 0.9x0.18 smd mask+0: 11(2.514,-2.275) 12(2.514,-1.925) 13(2.514,-1.575) 14(2.514,-1.225) 15(2.514,-0.875) 16(2.514,-0.525) 17(2.514,-0.175) 18(2.514,0.175) 19(2.514,0.525) 20(2.514,0.875) 21(2.514,1.225) 22(2.514,1.575) 23(2.514,1.925) 24(2.514,2.275) 35(-2.514,2.275) 36(-2.514,1.925) 37(-2.514,1.575) 38(-2.514,1.225) 39(-2.514,0.875) 40(-2.514,0.525) 41(-2.514,0.175) 42(-2.514,-0.175) 43(-2.514,-0.525) 44(-2.514,-0.875) 45(-2.514,-1.225) 46(-2.514,-1.575) 47(-2.514,-1.925) 48(-2.514,-2.275)
  silkscreen extent -2.51,-3.31 2.51,2.77
SMD_2x2mm [mm]
  rect 1x2 smd: 1(-0.905,0) 2(0.905,0)
  silkscreen extent -0.47,-1 0.53,1
XT3225 [mm]
  oct 1.3x1.1 smd: 1(0,0)
  rect 1.3x1.1 smd: 2(2.3,0) 3(2.3,1.9) 4(0,1.9)
  silkscreen extent -1.02,-0.8 3.27,2.74

## Part data
C1 C1 C1 C1 C1 C1 C1 C1 C1 C1 C1 C2 C2 C2 C2 C2 C2 C2 C2 C2 C2 C2 C3 C3 C3 C3 C3 C3 C3 C3 C3 C3 C3 C4 C4 C4 C4 C4 C4 C4 C4 C4 C4 C4 C5 C5 C5 C5 C5 C5 C5 C5 C5 C5 C5: library part CAP, "Capacitor"
E1: "Generic Antenna"
L1 L1 L1 L1 L1 L1 L1 L1 L1 L1 L1: library part INDUCTOR
U1 U1 U1 U1 U1 U1 U1 U1 U1 U1 U1: "RISC-V MCU with BLE/2*USB/ADC/PWM/SPI/I2C/4*UART"
Y1 Y1 Y1 Y1 Y1 Y1 Y1 Y1 Y1 Y1 Y1: library part XTAL, "Crystal Oscillator"

## Via types
v1: diameter 24, hole 12, Top Layer to Bottom Layer, tented both sides, 1221 vias
v2: diameter 28, hole 16, Top Layer to Bottom Layer, tented both sides, 209 vias